# Altium PCB ShieldBoard.PcbDoc
Units mil, origin at the board's own origin, x right, y up, seen from the top; angles counter-clockwise.
Board outline 2610 x 2330 mil, 2 copper layers (Top Layer, Bottom Layer), stack 62.8 mil thick; 15 components, 31 nets, 62 pads, 20 vias.
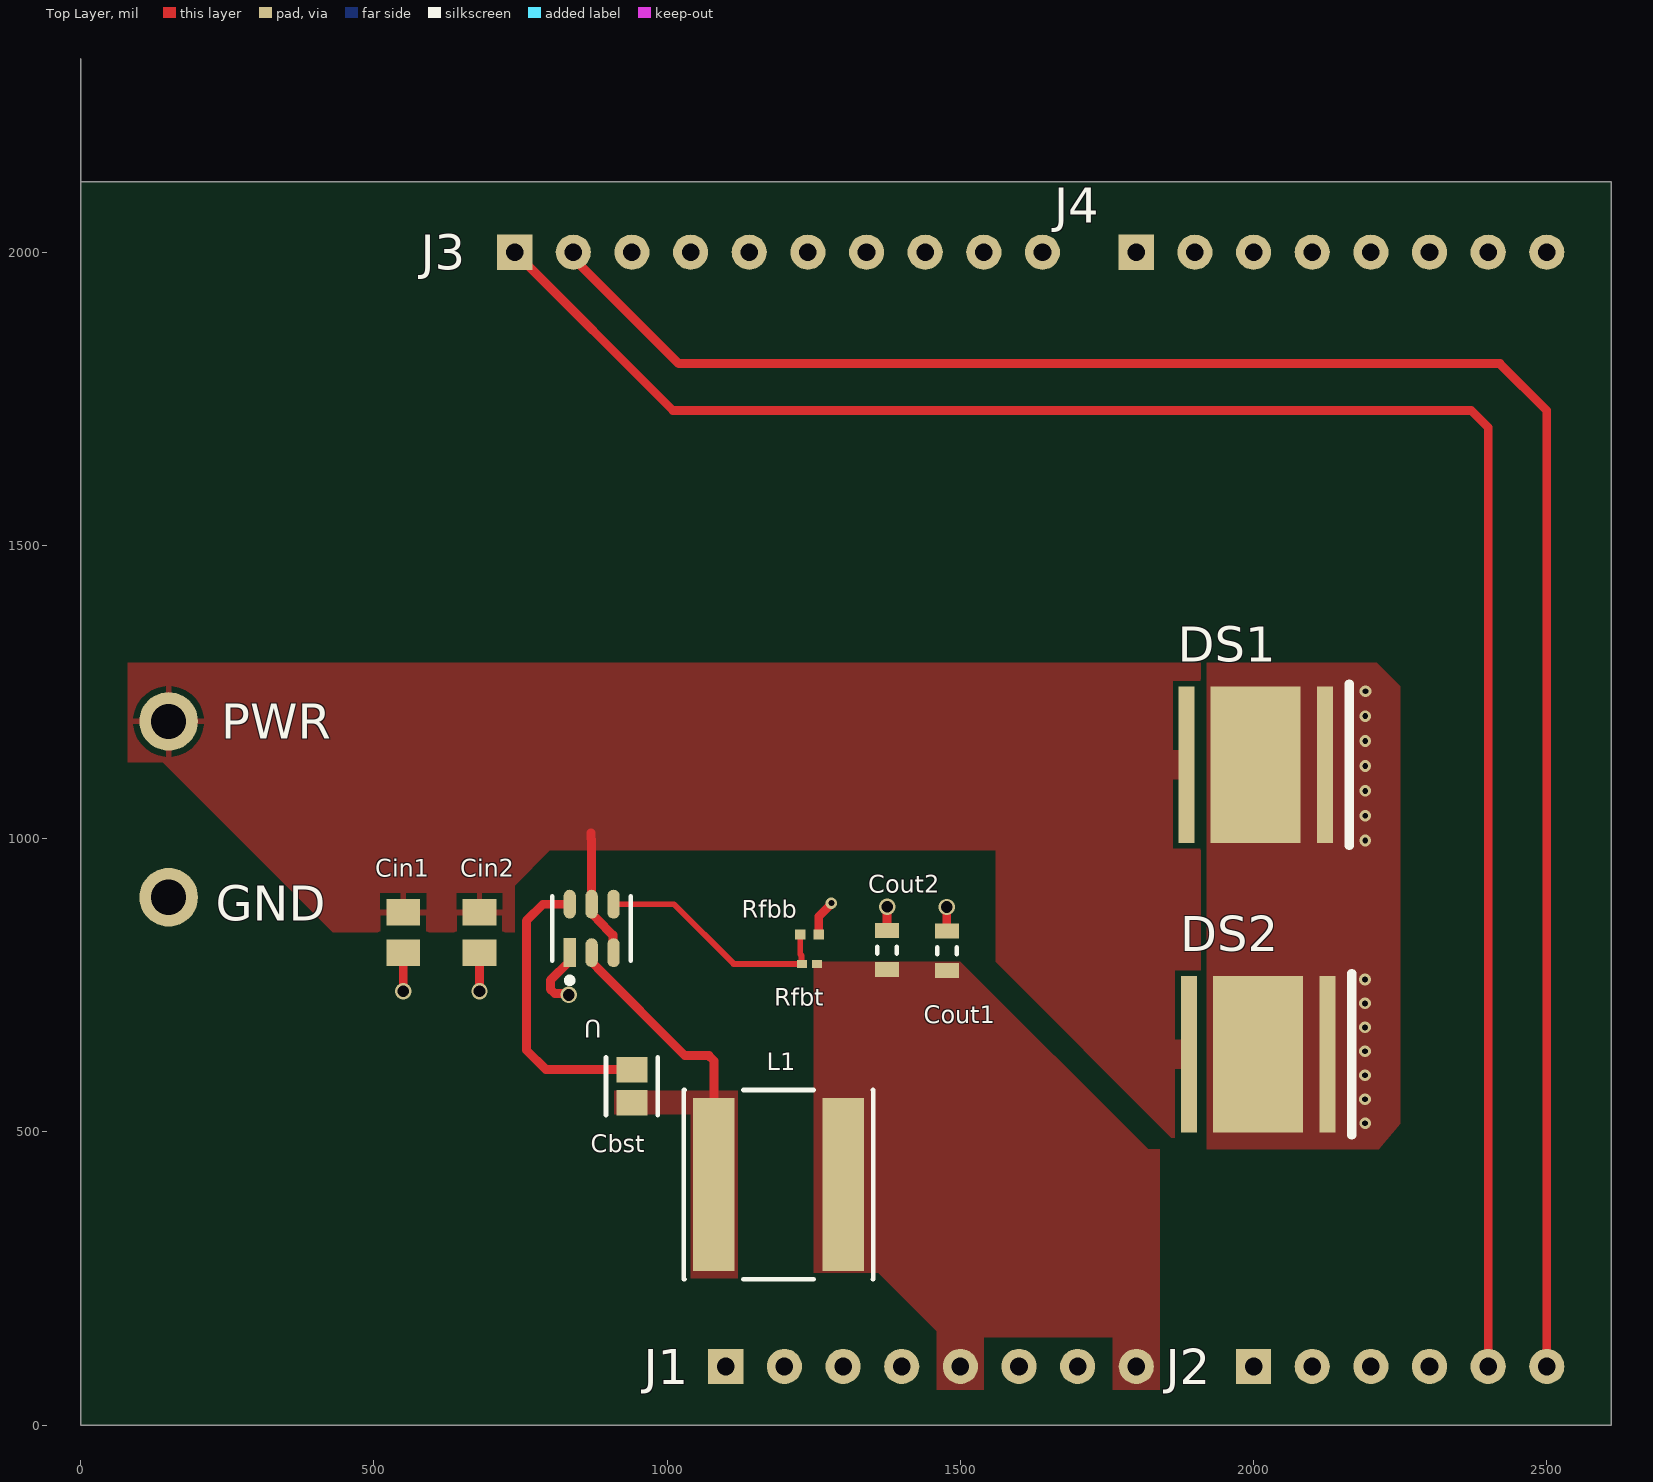
[diagram p0: Top Layer view]
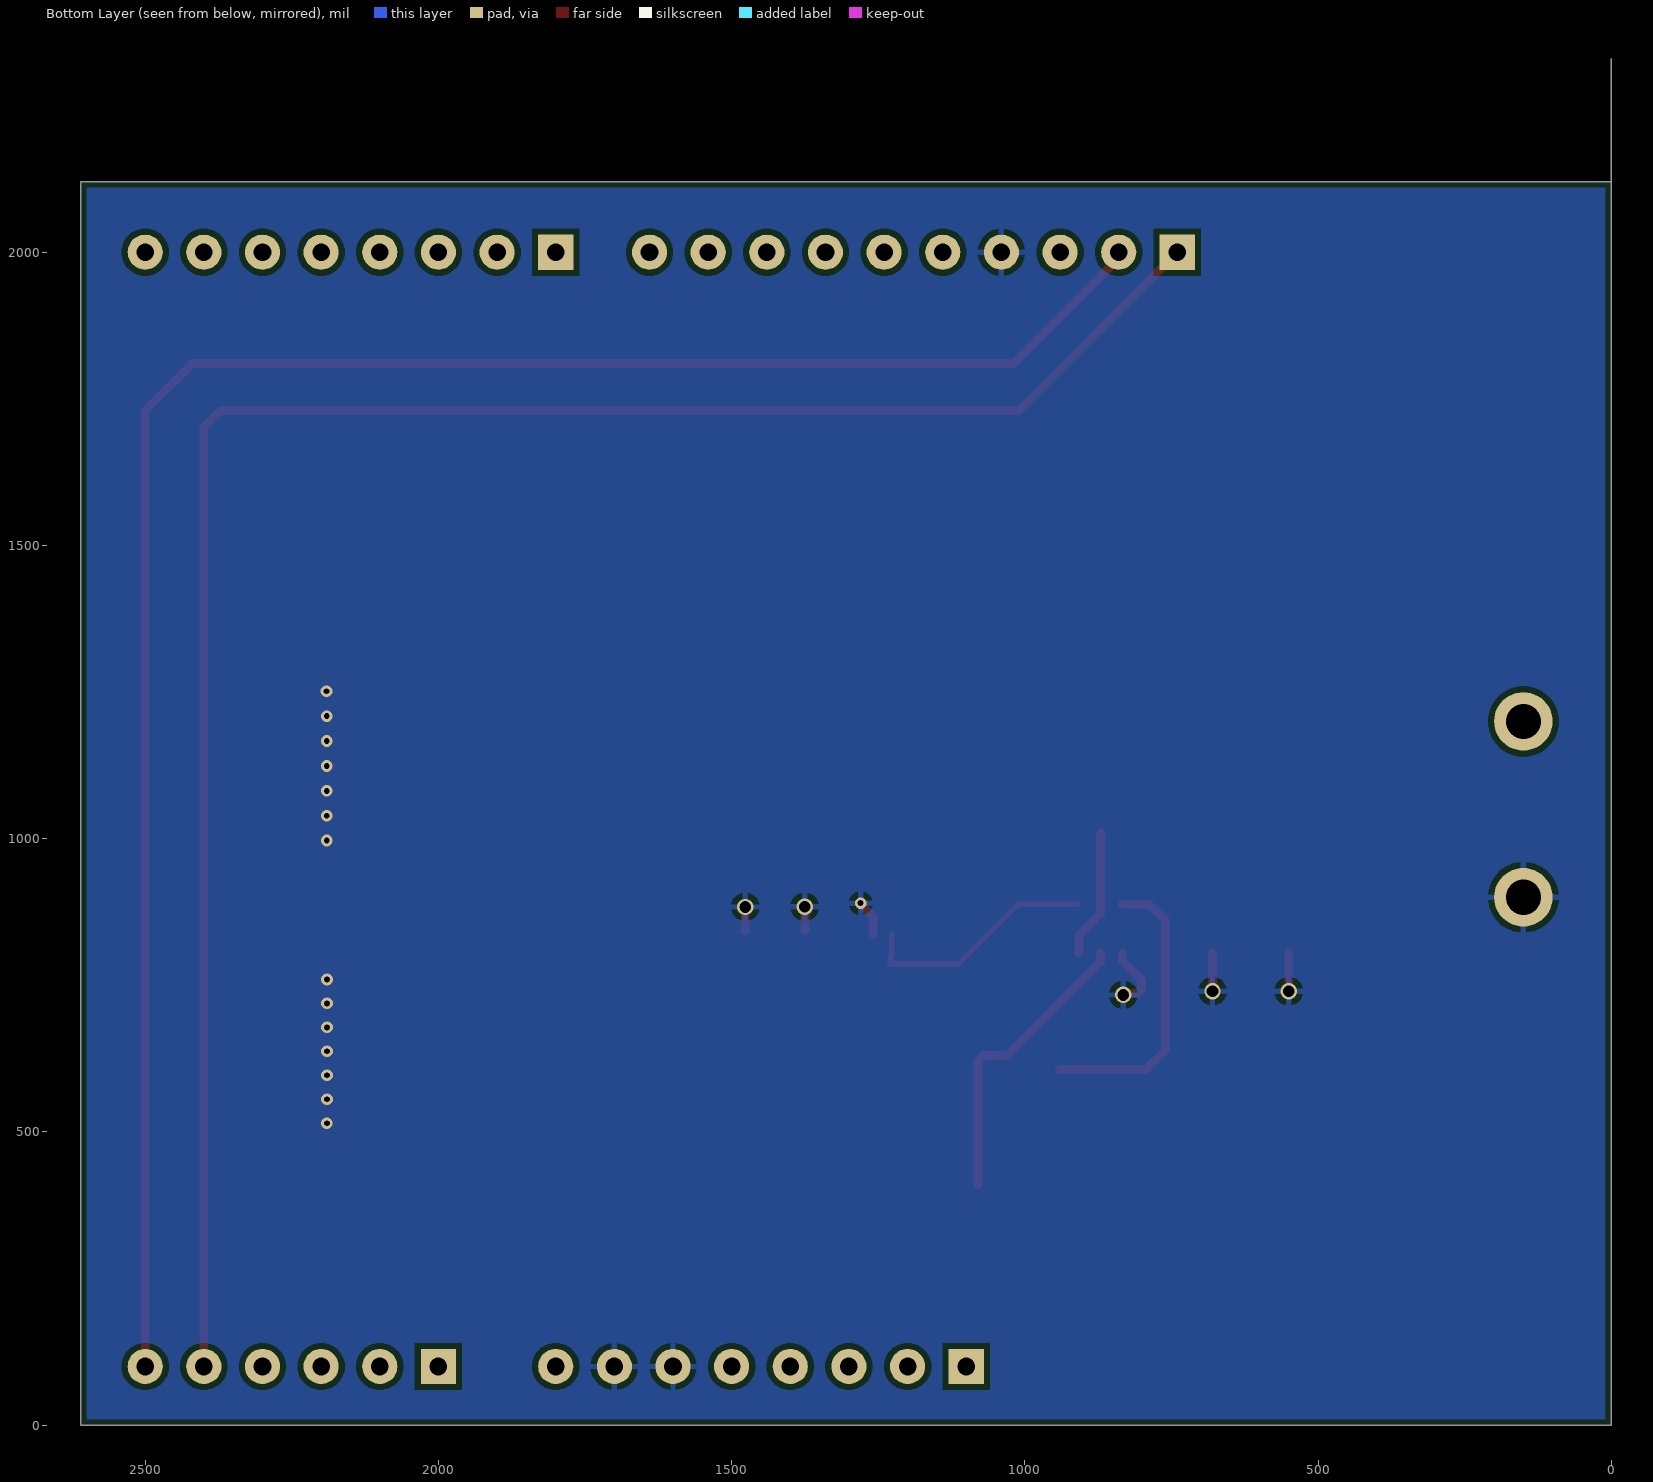
[diagram p1: Bottom Layer view, seen from below]
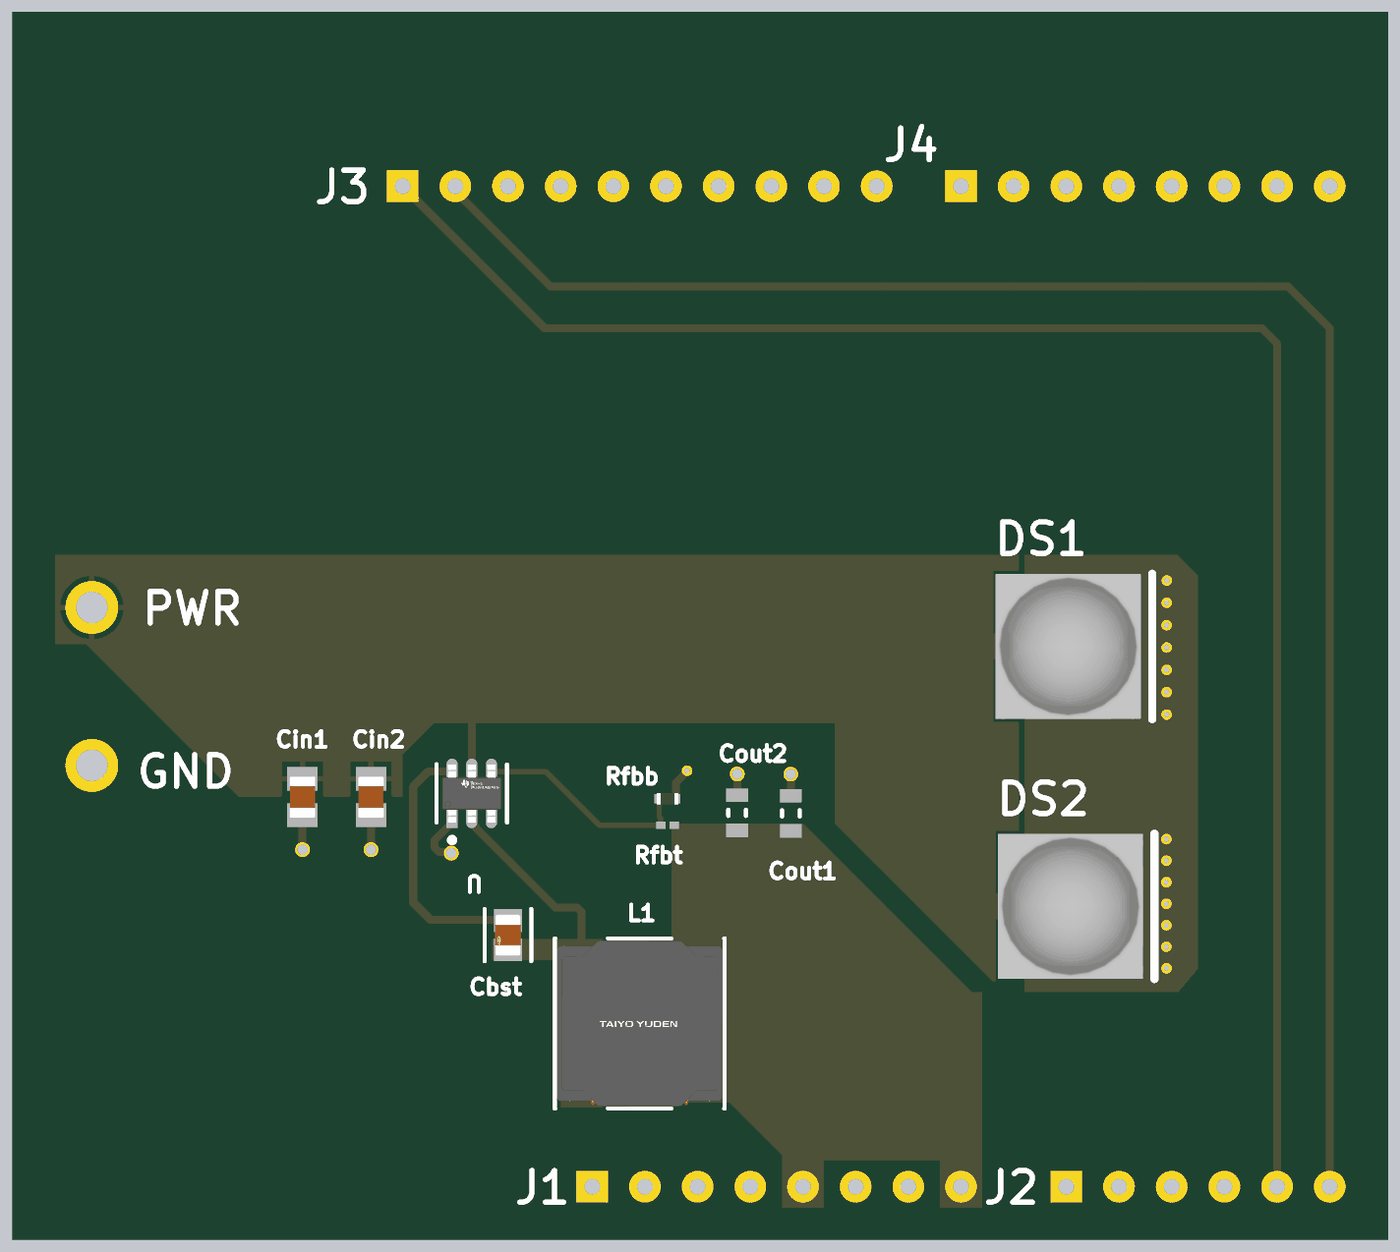
[diagram p2: 3D render of the assembled board from above, using the file's embedded part models]

## Layer stack, top to bottom
Top Solder: solder mask 0.4, Solder Resist, Dk 3.5
Top Layer: signal copper 1.4
Dielectric 1: dielectric 60, FR-4, Dk 4.8
Bottom Layer: signal copper 1.4
Bottom Solder: solder mask 0.4, Solder Resist, Dk 3.5

## Board outline
0,2120 2610,2120 2610,0 0,0 0,2330

## Design rules (kind name [scope] priority, off if disabled: settings)
BoardOutlineClearance [All] p1: gap=10 ignorepadtopadclearanceinfootprint=FALSE
Clearance [All] p1: gap=10 ignorepadtopadclearanceinfootprint=TRUE
MinimumSolderMaskSliver [All] p1: minsoldermaskwidth=5
PolygonConnect [All] p1: connectstyle=Relief reliefconductorwidth=10 reliefentries=4 polygonreliefangle="90 Angle" airgapwidth=10
RoutingVias [All] p1: holewidth=10 width=18 viastyle="Through Hole" minholewidth=6 minwidth=14 maxholewidth=28 maxwidth=50
SolderMaskExpansion [All] p1: expansion=0 istentingtop=FALSE
SupplyNets "Schematic Supply Nets_2" [InNet('+5')] p1: voltage=0.000
SupplyNets "Schematic Supply Nets_1" [InNet('GND')] p2: voltage=0.000
SupplyNets "Schematic Supply Nets" [InNet('+12')] p3: voltage=0.000
Width [All] p1: maxlimit=30 minlimit=5 preferedwidth=10
29 further rules are at their usual default settings.

## Components (designator, comment, footprint, x,y, rotation, side; value= is the part's Value field where it differs from the comment)
Cbst "08053C104KAT2A" FP-0805-L_2_01_0_2-W_1_25-IPC_C 940,577.79 r270 top value=100nF
Cin1 "C2012X5R1V106K085AC" CAPC2012X100N 550,840 r90 top value=10µF
Cin2 "C2012X5R1V106K085AC" CAPC2012X100N 680,840 r90 top value=10µF
Cout1 "C1608X5R1A226M080AC" CAPC1608X100X20ML10 1477.01,809.02 r270 top value=22µF
Cout2 "C1608X5R1A226M080AC" CAPC1608X100X20ML10 1375.05,810 r270 top value=22µF
DS1 "MKRAWT-00-0000-0D0HG235H" CREE-MK-R-2_V 2003.64,1126.06 r0 top
DS2 "MKRAWT-00-0000-0D0HG235H" CREE-MK-R-2_V 2007.84,632.32 r0 top
J1 "1x8-Pin-Header" 1x8-Pin-Header-Footprint-1 1100,100 r0 top
J2 "1x6-Pin-Header" "Pin Header 1x6-Footprint-1" 2000,100 r0 top
J3 "1x10-Pin-Header" 1x10-Pin-Header-Footprint-1 740,2000 r0 top
J4 "1x8-Pin-Header" 1x8-Pin-Header-Footprint-1 1800,2000 r0 top
L1 "NRS8030T3R3MJGJ" FP-NRS8030-MFG 1190,410 r0 top value=3.3µH
Rfbb "ERJ2RKF1002X" RESC1005X40X25LL05T05 1242.82,836.54 r180 top value=10KOhm
Rfbt "CRCW020156K2FNED" RESC0603X28X15NL05T05 1242.82,786.54 r0 top value="56.2 kOhm"
U "TPS562201DDCR" FP-DDC0006A-IPC_C 871.25,846.9 r90 top

## Footprints (in the part's own frame and the unit in brackets; to place one, negate y for a bottom-side part, rotate by r counter-clockwise, add the part's x,y. Pads: shape width x height; smd on the part's side, far side on the other; paste and mask are expansions set on the pad)
1x8-Pin-Header-Footprint-1 [mil]
  rect 60x60 hole 30: 1(0,0)
  round 60 hole 30: 2(100,0) 3(200,0) 4(300,0) 5(400,0) 6(500,0) 7(600,0) 8(700,0)
1x10-Pin-Header-Footprint-1 [mil]
  rect 60x60 hole 30: 1(0,0)
  round 60 hole 30: 2(100,0) 3(200,0) 4(300,0) 5(400,0) 6(500,0) 7(600,0) 8(700,0) 9(800,0) 10(900,0)
CAPC1608X100X20ML10 [mm] "Chip Capacitor, 2-Leads, Body 1.70x0.90mm, IPC Low Density"
  rect 0.65x1.05 smd: 1(-0.85,0) 2(0.85,0)
  silkscreen extent -0.15,-0.43 0.15,0.43, body extent -0.85,-0.45 0.85,0.45, height 1
CAPC2012X100N [mm]
  rect 1.15x1.47 smd: 1(-0.88,0) 2(0.88,0)
  body extent -1,-0.63 1,0.63, height 1
CREE-MK-R-2_V [mm] "SMD, 2-Leads, Body 7x7mm, Thermal Pad 3.9x6.76mm"
  rect 0.7x6.76 smd: 1(-3,0) 2(3,0)
  rect 3.9x6.76 smd: 3(0,0)
  silkscreen extent 4.05,-3.5 4.05,3.5, body extent -3.5,-3.5 3.5,3.5, height 4.1
FP-0805-L_2_01_0_2-W_1_25-IPC_C [mil]
  rect 43.49x53.39 smd paste+0 mask+0: 1(-27.79,0) 2(27.79,0)
  silkscreen extent -50,-44 50,44, body extent -53,-32 53,32, height 10
FP-DDC0006A-IPC_C [mm]
  rect 1.254x0.532 smd paste+0 mask+0: 1(-1.05,0.95)
  rrect100% 1.254x0.532 smd paste+0 mask+0: 2(-1.05,0) 3(-1.05,-0.95) 4(1.05,-0.95) 5(1.05,0) 6(1.05,0.95)
  silkscreen extent -2.37,-1.7 1.4,1.7, body extent -1.78,-1.55 1.78,1.55, height 0.25
FP-NRS8030-MFG [mm]
  rect 1.8x7.5 smd paste+0 mask+0: 1(-2.8,0) 2(2.8,0)
  silkscreen extent -4.1,-4.1 4.1,4.1, body extent -4.2,-4.2 4.2,4.2, height 0.25
"Pin Header 1x6-Footprint-1" [mil]
  rect 60x60 hole 30: 1(0,0)
  round 60 hole 30: 2(100,0) 3(200,0) 4(300,0) 5(400,0) 6(500,0)
RESC0603X28X15NL05T05 [mm] "Chip Resistor, 2-Leads, Body 0.60x0.30mm, IPC Medium Density"
  rect 0.45x0.35 smd: 1(-0.325,0) 2(0.325,0)
  body extent -0.33,-0.17 0.33,0.18, height 0.28
RESC1005X40X25LL05T05 [mm] "Chip Resistor, 2-Leads, Body 1.05x0.55mm, IPC High Density"
  rect 0.45x0.45 smd: 1(-0.4,0) 2(0.4,0)
  body extent -0.53,-0.28 0.53,0.28, height 0.4

## Part data
Cbst: library part CMP-2000-05014-2, "General Purpose Ceramic Capacitor, 0805, 100nF, 10%, X7R, 0.15, 25V", Capacitance=100nF, Case Code (Imperial)=0805, Case Code (Metric)=2012, Dielectric=X7R, Insulation Resistance=100GR, Max Operating Temperature=125°C, Min Operating Temperature=-55°C, Package Quantity=1, Tolerance=10%, Voltage=25V, Case/Package=0805, Construction=Flat, Contact Plating=Tin, Depth=1.25mm, Dissipation Factor=3%, Height=0.94mm, Lead Free="Lead Free", Length=2.01mm, Mount="Surface Mount", Number of Pins=2, Packaging="Tape and Reel", Radiation Hardening=No, REACH SVHC="No SVHC", RoHS Compliant=Yes, Series=-, Termination=SMD/SMT, Thickness=0.037inch, Voltage Rating=25V, Voltage Rating (DC)=25V, Width=0.049inch
Cin1 Cin2: library part CMP-001-00085-2, "10ÂµF Â±10% 35V Ceramic Capacitor X5R 0805 (2012 Metric)", Capacitor Type=Ceramic, Case/Package=0805, Max Operating Temperature=85°C, Min Operating Temperature=-55°C, Component Type=Standard, Design Item ID=C2012X5R1V106K085AC, MF=TDK, Mounting Technology="Surface Mount", MP=C2012X5R1V106K085AC, Pins=2, Purchase-URL=https://pricing.snapeda.com/search/part/C2012X5R1V106K085AC/?ref=eda, RoHS Compliant=Yes, SnapEDA_Link=https://www.snapeda.com/parts/C2012X5R1V106K085AC/TDK-Lambda+Americas+Inc/view-part/?ref=snap, Source=C2012X5R1V106K085AC.SchLib
Cout1 Cout2: library part CMP-2000-05441-1, "Chip Capacitor, 22 uF, +/- 20%, 10 V, -55 to 85 degC, 0603 (1608 Metric), RoHS, Tape and Reel", Capacitance=22µF, Manufacturer=TDK, Operating Temperature=-55degC~85degC, Package / Case=0603(1608Metric), Package Description="2-Pin Surface Mount Device, Body 1.6 x 0.8 mm", Package Reference=603, PCN Part Number=MLCCPartNumberChange30/Nov/2012, Ratings=-, Standard Package=1, Temperature Coefficient=X5R, Tolerance=±20%, Voltage - Rated=10V, Applications=GeneralPurpose, Category=Capacitors, Datasheet URL=http://download.siliconexpert.com/pdfs/2015/4/21/15/54/45/779/tdk_/manual/37024850441143360mlcc_commercial_general_en.pdf, Datasheet Version=Mar-15, Design Resources=20WNon-IsolatedBuckLEDDriverUsingPLLNK460KG, Family=CeramicCapacitors, Features=-, Height - Seated (Max)=-, Kits=445-9014-KIT-ND-KITMLCC100PF-22UF060310-50V, Lead Spacing=-, Lead Style=-, Manufacturer URL=http://www.tdk.com/, Mounting Type=SurfaceMount,MLCC, Online Catalog=CSeries,GeneralPurpose, Other Names=445-9077-1, Packaging=CutTape(CT), Product Training Modules=CSeriesGeneralApplicationsSEAT,CCV,andTVCLDesignToolsGuidetoReplacinganElectrolyticCapacitorwithanMLCC, RoHS Information=RoHSCertificate-MLCC, Series=C, Size / Dimension="0.063\"Lx0.031\"W(1.60mmx0.80mm)", Thickness (Max)="0.035\"(0.90mm)"
DS1 DS2: library part CMP-2100-00977-1, "LED, White, 12 V, 2-Pin SMD, RoHS, Tape and Reel"
J1 J4: library part CMP-002-00073-3, "Pin Header 1x8"
J2: library part CMP-002-00071-5, "Pin Header 1x6"
J3: library part CMP-002-00072-3, "Pin Header 1x10"
L1: library part CMP-14484-000405-1, "Inductor Power Shielded Wirewound 3.3uH 20% 100KHz Ferrite 4.2A 24.7mΩ DCR T/R", Case/Package=Nonstandard, Current Rating=4.3A, DC Resistance (DCR)=19mR, Inductance=3.3uH, Inductance Tolerance=20%, Max DC Current=4.2A, Max Operating Temperature=125°C, Min Operating Temperature=-25°C, Package Quantity=1000, Resistor Type=Wirewound, Self Resonant Frequency=50MHz, Test Frequency=100kHz, Core Material=Ferrite, Depth=8.2mm, Halogen Free="Halogen Free", Height=3mm, Height - Seated (Max)=0.118inch, Lead Free="Lead Free", Lead Pitch=5.6mm, Length=8mm, Mount="Surface Mount", Number of Pins=2, Packaging="Tape and Reel", Radiation Hardening=No, REACH SVHC="No SVHC", RMS Current (Irms)=4.3A, RoHS Compliant=Yes, Saturation Current=4.2A, Series=NRS, Shielding=Shielded, Termination=SMD/SMT, Tolerance=20%, Width=0.315inch
Rfbb: library part CMP-2000-07588-1, "Chip Resistor, 10 KOhm, +/- 1%, 0.1 W, -55 to 155 degC, 0402 (1005 Metric), RoHS, Tape and Reel", Case Code (Imperial)=0402, Case Code (Metric)=1005, Manufacturer=Panasonic, Max Operating Temperature=155degC, Max Power Dissipation=100mW, Min Operating Temperature=-55degC, Package Description="2-Pin Surface Mount Device, Body 1 x 0.5 mm", Package Quantity=1, Package Reference=402, Resistance=10KOhm, Temperature Coefficient=100ppm\/degreesC, Tolerance=1%, Voltage Rating=50V, Case\/Package=0402, Composition=ThickFilm, Contact Plating=Tin, Datasheet URL=https://industrial.panasonic.com/cdbs/www-data/pdf/RDA0000/AOA0000C304.pdf, Datasheet Version=02/2017, Depth=0.5mm, Height=0.35mm, Lead Free=LeadFree, Length=1mm, Manufacturer URL=http://www.panasonic.com/, Military Standard=Not, Mount=SurfaceMount, Mounting Technology=SurfaceMount, Number of Pins=2, Number of Terminations=2, Packaging=TapeandReel, Power Rating=100mW, Radiation Hardening=No, REACH SVHC=NoSVHC, RoHSCompliant=True, Termination=SMD/SMT, Voltage Rating (DC)=50V, Width=0.02inch
Rfbt: library part CMP-2004-00723-1, Manufacturer="Vishay Dale", Part Number=CRCW020156K2FNED
U: library part CMP-04918-000361-1, "IC REG BUCK ADJ 2A TSOT23-6", Case/Package=SOT, Max Input Voltage=17V, Max Operating Temperature=125°C, Max Output Current=2A, Min Input Voltage=4.5V, Min Operating Temperature=-40°C, Output Voltage=7V, Quiescent Current=400uA, Switching Frequency=580kHz, Contact Plating=Tin, Lead Free="Lead Free", Mount="Surface Mount", Number of Outputs=1, Number of Pins=6, Operating Supply Voltage=17V, Output Type=Adjustable, RoHS Compliant=Yes

## Free pads (board coordinates)
  round 100 hole 60: 18(150,1200) 19(150,900)

## Via types
v1: diameter 20, hole 10, Top Layer to Bottom Layer, 15 vias
v2: diameter 28, hole 20, Top Layer to Bottom Layer, 5 vias

## Nets (pads, with @x,y where several pads share a name; then routed paths per layer and width w, separated by ;. In a path a pad name is that pad's centre, name@x,y a point inside that pad or via, vN(x,y) a via of type N, cw(c..) or ccw(c..) an arc to the next point about the centre after c; other vN are vias at no path point)
3.3V: J1.4
+5: Cout1.2 Cout2.2 J1.5 J1.8 L1.2 Rfbt.2
+12: Cin1.2 Cin2.2 DS1.1 DS2.1 pad.18 U.3 U.5 | length 220.5
  Top Layer w15: 870,1010 870,1000 871.25,998.75 U.5 871.25,872.42 880.68,863 880.68,862.44 907.51,835.61 907.51,806.69 U.3
A0: J2.1
A1: J2.2
A2: J2.3
A3: J2.4
A4: J2.5 J3.1 | length 3385
  Top Layer w15: J3.1 1010,1730 2371.21,1730 2400,1701.21 J2.5
A5: J2.6 J3.2 | length 3407.7
  Top Layer w15: J3.2 840,1990 1020,1810 2420,1810 2500,1730 J2.6
AREF: J3.3
D0: J4.8
D1: J4.7
D2: J4.6
D3: J4.5
D4: J4.4
D5: J4.3
D6: J4.2
D7: J4.1
D8: J3.10
D9: J3.9
D10: J3.8
D11: J3.7
D12: J3.6
D13: J3.5
GND: Cin1.1 Cin2.1 Cout1.1 Cout2.1 DS1.2 DS1.3 DS2.2 DS2.3 J1.6 J1.7 J3.4 pad.19 Rfbb.1 U.1 | length 385.9
  Top Layer w15: v2(550,740) Cin1.1 ; v2(680,740) Cin2.1 ; v2(832.34,733.5) 829.85,735.99 808.23,735.99 800.97,743.25 800.97,758.46 833.85,791.33 U.1 ; Rfbb.1 1258.57,867.21 1280,888.65 v1(1280,890) ; Cout2.1 Cout2.1 1375.13,883.76 v2(1375.22,883.85) ; v2(1476.92,883.53) 1476.96,883.48 Cout1.1 Cout1.1
  other v1: 2190.26,514.77 2190,555.64 2190,596.52 2190,637.39 2190,678.26 2190,719.13 2190,760 2190.48,996.7 2190.48,1039.13 2190.48,1081.56 2190.48,1123.99 2190.37,1166.42 2190.48,1208.86 2190.77,1251.29
IOREF: J1.2
N-C: J1.1
NetCbst_1: Cbst.1 U.6 | length 500
  Top Layer w15: U.6 788.25,888.25 760,860 760,639.72 793.15,606.57 939.01,606.57 Cbst.1
NetRfbb_2: Rfbb.2 Rfbt.1 U.4 | length 410.9
  Top Layer w10: U.4 1011.75,888.25 1113.46,786.54 Rfbt.1 ; Rfbb.2 1227.07,802.93 1229.25,800.75 Rfbt.1@1229.25,790
RESET: J1.3
SW_OUT: Cbst.2 L1.1 U.2 | length 506
  Top Layer w15: U.2 871.25,789.72 880.68,780.3 880.68,779.74 1030.42,630 1071.21,630 1080,621.21 1080,410.24 L1.1

## Polygon pours and split planes (outlines as drawn)
SW_OUT on Top Layer "SW_OUT_L01_P008" (solid, pour order 8): 910,570 1120,570 1120,250 1040,250 1040,530 910,530
+5 on Top Layer "+5_L01_P007" (solid, pour order 7): 1250,260 1360,260 1460,160 1460,60 1540,60 1540,150 1760,150 1760,60 1840,60 1840,470 1820,470 1500,790 1250,790
+12 on Top Layer "+12_L01_P006" (solid, pour order 6): 80,1300 1910,1300 1910,490 1860,490 1560,790 1560,980 800,980 740,920 740,840 430,840 140,1130 80,1130
GND on Top Layer "GND_L01_P004" (solid, pour order 4): 1920,470 2213.21,470 2250,513.82 2250,530 2250,1260 2210,1300 1920,1300
GND on Bottom Layer "GND_L02_P000" (solid, pour order 0): 0,0 2610,0 2610,2200 0,2200

## Silkscreen, mask and mechanical layers (free items; w line width, h text height)
Top Overlay:
  text "PWR" at 240,1170 h60
  text "GND" at 230,860 h60